# Altium PCB PMP30825_RevA.PcbDoc (part 1 of 3)
Units mil, origin at the board's own origin, x right, y up, seen from the top; angles counter-clockwise.
Board outline 3750 x 1750 mil, 2 copper layers (Top Layer, Bottom Layer), stack 62 mil thick; 85 components, 40 nets, 187 pads, 24 vias.
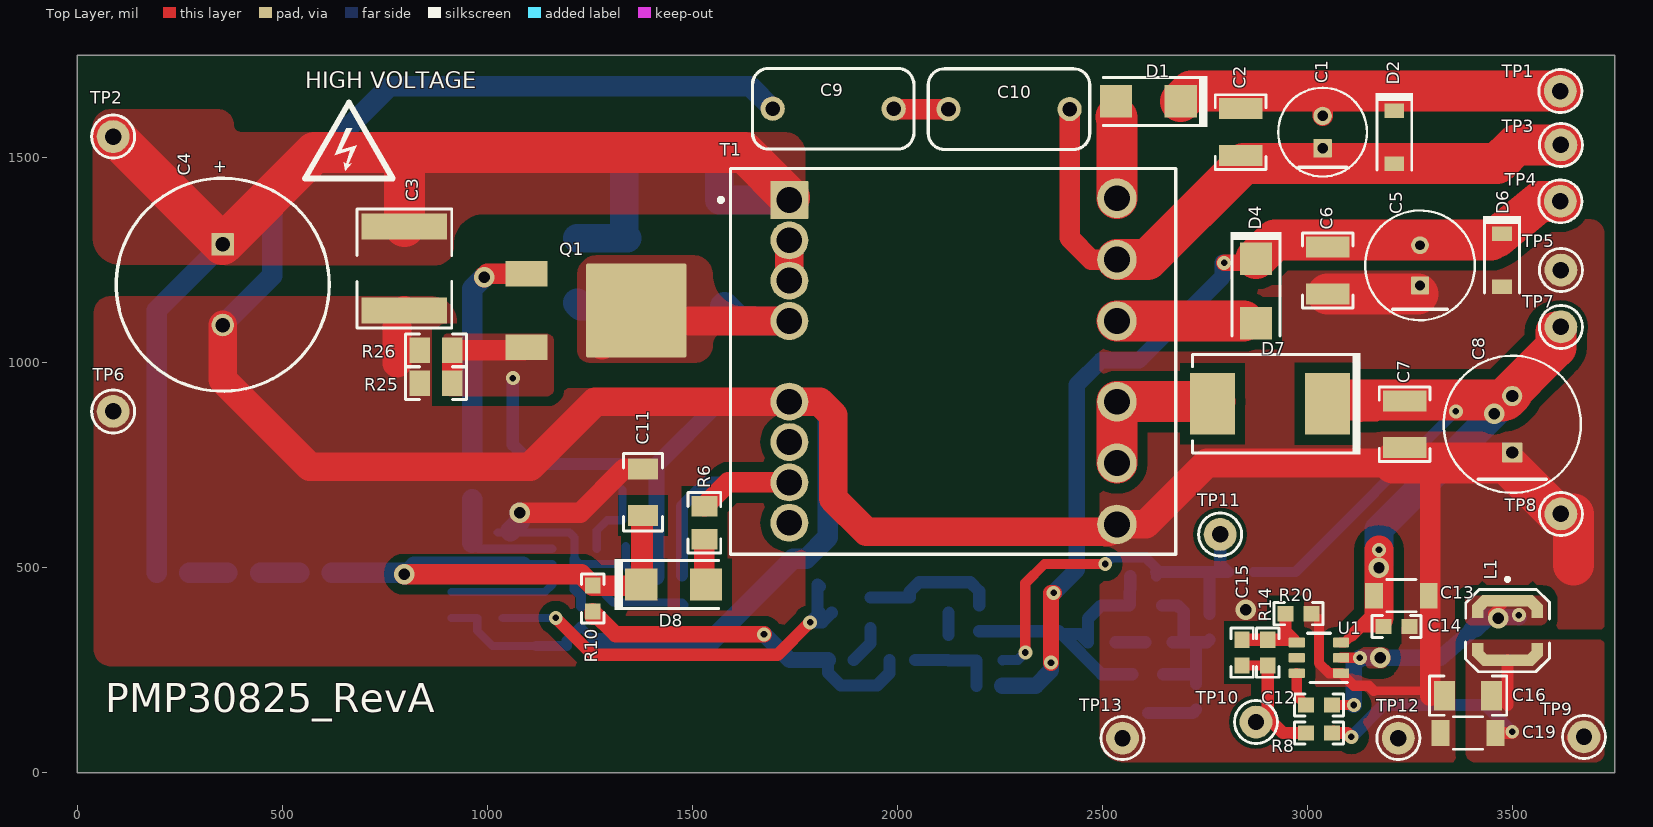
[diagram p0: Top Layer view]
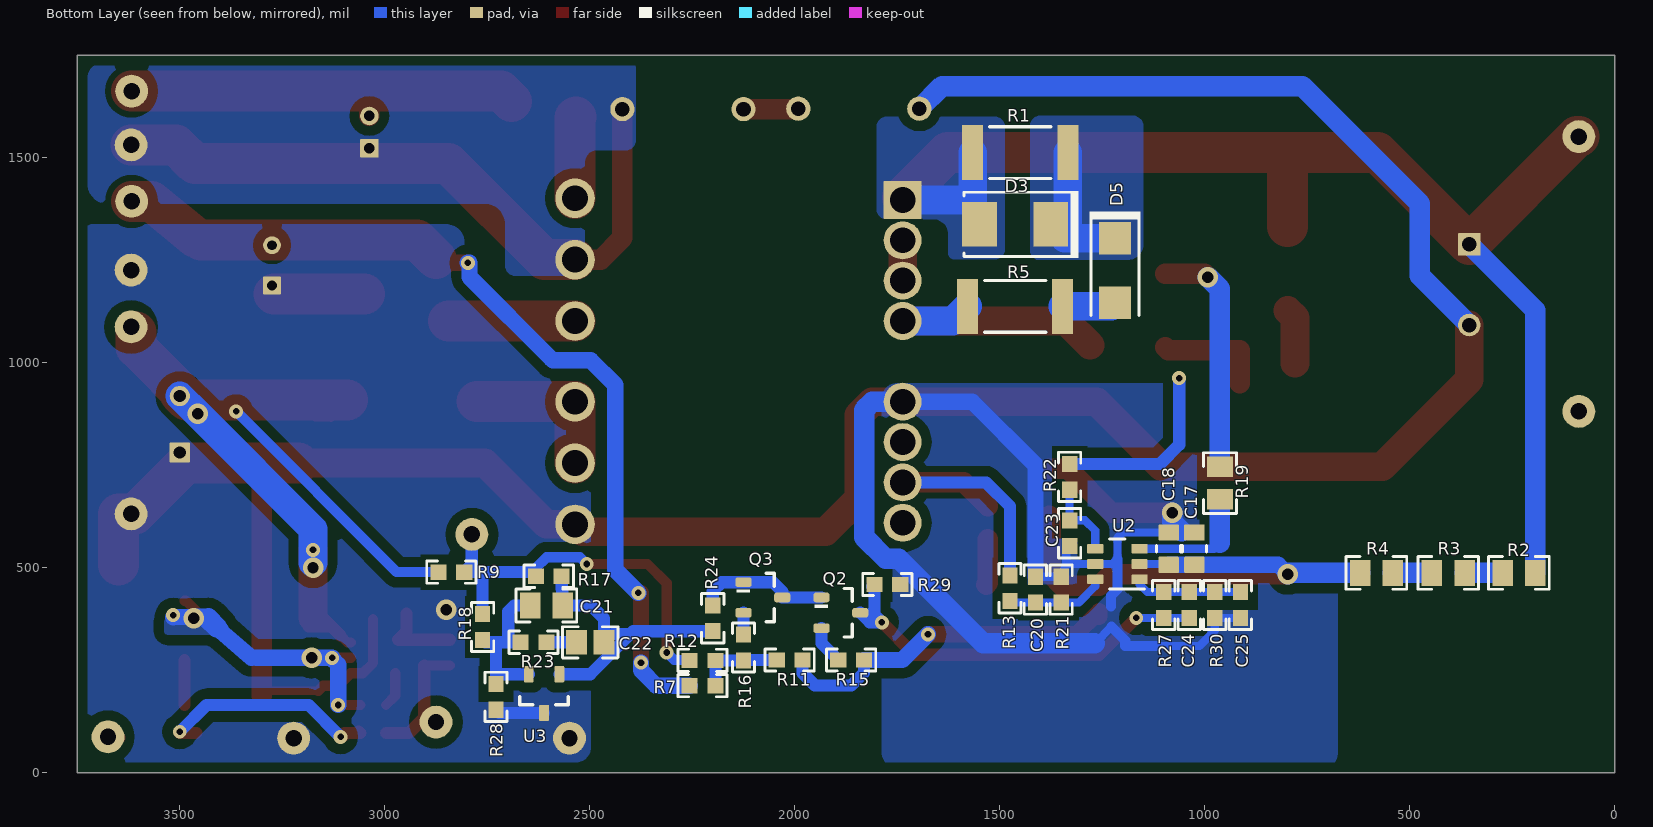
[diagram p1: Bottom Layer view, seen from below]

## Layer stack, top to bottom
Top Solder: solder mask 0.4, Solder Resist, Dk 3.5
Top Layer: signal copper 1.4
Dielectric1: core 59.2, FR-4, Dk 4.8
Bottom Layer: signal copper 1.4
Bottom Solder: solder mask 0.4, Solder Resist, Dk 3.5

## Board outline
0,0 3750,0 3750,1750 0,1750

## Design rules (kind name [scope] priority, off if disabled: settings)
AcuteAngle [All] p1: minimum=4.50000000000000E+0001 checktracksonly=FALSE
AssemblyTestPointUsage [All] p1: valid=2
BoardOutlineClearance BoardOutlineClearance_MountingHoles [OnCopper and InComponentClass('Mounting Holes')] p1: gap=39.37 ignorepadtopadclearanceinfootprint=FALSE
BoardOutlineClearance BoardOutlineClearance_Poly [OnCopper and IsPoly] p2: gap=25 ignorepadtopadclearanceinfootprint=FALSE
BoardOutlineClearance [OnCopper and Not InComponentClass('Logo') and not InComponentClass('FiducialMark') and not InRegion(1000,500,4000,800) and not InPoly] p3: gap=30 ignorepadtopadclearanceinfootprint=FALSE
Clearance Clearance_Keepouts [((IsTrack Or IsArc) And Not InPoly) And IsFree and IsKeepOut vs ((IsTrack Or IsArc) And Not InPoly) And IsFree and IsKeepOut] p1: gap=0 ignorepadtopadclearanceinfootprint=FALSE
Clearance Clearance_Poly [InPolygon] p2: gap=25 ignorepadtopadclearanceinfootprint=TRUE
Clearance Clearance_FiducialMark [IsKeepOut and InComponentClass('FiducialMark') vs IsPad and InComponentClass('FiducialMark')] p3: gap=0 ignorepadtopadclearanceinfootprint=FALSE
Clearance [All] p4: gap=7.87 ignorepadtopadclearanceinfootprint=TRUE
ComponentClearance ComponentClearance_MountingHoles_FiducialMarks [InComponentClass('Mounting Holes') vs InComponentClass('FiducialMark')] p1: gap=50 collisioncheckmode=3 verticalgap=10 showdistances=FALSE
ComponentClearance ComponentClearance_Shunt [InComponentClass('Header') vs InComponentClass('Shunt')] p2: gap=0 collisioncheckmode=3 verticalgap=0 showdistances=FALSE
ComponentClearance ComponentClearance_Logo [InComponentClass('Logo')] p3: gap=50 collisioncheckmode=3 verticalgap=10 showdistances=FALSE
ComponentClearance ComponentClearance_ScrewToNut [(HasFootprint('NY PMS 440 0025 PH')) vs (HasFootprint('Keystone_1902C'))] p4: gap=5 collisioncheckmode=3 verticalgap=10 showdistances=FALSE
ComponentClearance ComponentClearance_MountingHoles [InComponentClass('Mounting Holes')] p5: gap=250 collisioncheckmode=3 verticalgap=100000 showdistances=FALSE
ComponentClearance ComponentClearance_SmallPassives [HasFootprint('0201*') or HasFootprint('0402*') or HasFootprint('0508') or HasFootprint('0603*') or HasFootprint('0612') or HasFootprint('0805*') or HasFootprint('0815*') or HasFootprint('0830*') or HasFootprint('1206*') or HasFootprint('1210*') or HasFootprint('1808*') or HasFootprint('1812*') or HasFootprint('1825*') or HasFootprint('2010*') or HasFootprint('2220*') or HasFootprint('2225*') or HasFootprint('2512*') or HasFootprint('2728*') or HasFootprint('3518*') vs HasFootprint('0201*') or HasFootprint('0402*') or HasFootprint('0508') or HasFootprint('0603*') or HasFootprint('0612') or HasFootprint('0805*') or HasFootprint('0815*') or HasFootprint('0830*') or HasFootprint('1206*') or HasFootprint('1210*') or HasFootprint('1808*') or HasFootprint('1812*') or HasFootprint('1825*') or HasFootprint('2010*') or HasFootprint('2220*') or HasFootprint('2225*') or HasFootprint('2512*') or HasFootprint('2728*') or HasFootprint('3518*')] p6: gap=5 collisioncheckmode=3 verticalgap=10 showdistances=FALSE
ComponentClearance ComponentClearance_THtoSMT [IsThruComponent vs IsSMTComponent] p7: gap=40 collisioncheckmode=3 verticalgap=30 showdistances=FALSE
ComponentClearance ComponentClearance_THtoTH [IsThruComponent vs IsThruComponent] p8: gap=30 collisioncheckmode=3 verticalgap=30 showdistances=FALSE
ComponentClearance [All] p9: gap=30 collisioncheckmode=3 verticalgap=10 showdistances=FALSE
DiffPairsRouting [All] p1: maxlimit=100 minlimit=10 mostfreqgap=10 toplayer_minwidth=15 toplayer_maxwidth=15 toplayer_prefwidth=15 bottomlayer_minwidth=15 bottomlayer_maxwidth=15 bottomlayer_prefwidth=15 maxuncoupledlength=1000
FabricationTestPointUsage TestPointUsage [All] p1: valid=2 allowmultiple=FALSE
FabricationTestpoint Testpoint [All] p1: side=3 testpointundercomponent=TRUE minsize=40 maxsize=100 preferedsize=60 minholesize=0 maxholesize=40 preferedholesize=32 testpointgrid=1 allowsidetop=TRUE allowsidebottom=TRUE usegrid=TRUE gridtolerance=0.01
FanoutControl Fanout_LCC [IsLCC] p1: bgadir=Out bgaviamode=Centered fanoutstyle=Auto fanoutdirection=Alternating viagrid=1 // Fanout_LCC (Default Rule)
FanoutControl Fanout_BGA [IsBGA] p2: bgadir=Out bgaviamode=Centered fanoutstyle=Auto fanoutdirection=Alternating viagrid=1 // Fanout_BGA (Default Rule)
FanoutControl Fanout_Default [All] p4: bgadir=Out bgaviamode=Centered fanoutstyle=Auto fanoutdirection=Alternating viagrid=1 // Fanout_Default (Default Rule)
FanoutControl Fanout_Small [(CompPinCount < 5)] p5: bgadir=Out bgaviamode=Centered fanoutstyle=Auto fanoutdirection=OutThenIn viagrid=1 // Fanout_Small (Default Rule)
Height [All] p1: minheight=0 maxheight=2000 prefheight=500
HoleSize [All] p1: absolutevalues=TRUE maxlimit=251 minlimit=7.87 maxpercent=80.000 minpercent=20.000
MinimumAnnularRing MinimumAnnularRing_ThermalPadVias [IsVia and InAnyComponent] p1: minimumring=5.91
MinimumAnnularRing [All] p2: minimumring=7.87
MinimumSolderMaskSliver MinimumSolderMaskSliver_Logo [InComponentClass('Logo') vs InComponentClass('Logo')] p1: minsoldermaskwidth=0.7
MinimumSolderMaskSliver [All] p2: minsoldermaskwidth=3.94
PlaneConnect [All] p1: planeconnectstyle=Relief reliefexpansion=10 reliefentries=4 reliefconductorwidth=10 reliefairgap=10
PolygonConnect [All] p1: connectstyle=Direct reliefconductorwidth=10 reliefentries=4 polygonreliefangle="90 Angle" airgapwidth=10
RoutingVias ThermalPadVias [IsVia and InAnyComponent] p1: holewidth=7.87 width=19.68 viastyle="Through Hole" minholewidth=7.87 minwidth=19.68 maxholewidth=12.99 maxwidth=23.62
RoutingVias [All] p2: holewidth=16 width=34 viastyle="Through Hole" minholewidth=7.87 minwidth=26 maxholewidth=40 maxwidth=65
SilkToBoardRegionClearance [Not ((IsComment or IsDesignator) And (Hide <> 'False')) and not InRegion(1000,500,4000,800)] p1:
SilkToSilkClearance SilkToSilkClearance_Pb-FreeLogo [(HasFootprint('Pb-Free_Overlay_Medium') OR HasFootprint('Pb-Free_Overlay_Small')) vs (HasFootprint('Pb-Free_Overlay_Medium') OR HasFootprint('Pb-Free_Overlay_Small'))] p1: silktosilkclearance=0
SilkToSilkClearance [All] p2: silktosilkclearance=0
SilkToSolderMaskClearance SilkToComponentPadClearance [(IsPad or IsFill or IsRegion) and InAnycomponent] p1: minsilkscreentomaskgap=0 clearancetoexposedcopper=TRUE
SilkToSolderMaskClearance "Silk to Solder Mask Opening" [All] p2: minsilkscreentomaskgap=0 clearancetoexposedcopper=FALSE
SolderMaskExpansion [All] p1: expansion=1.97
UnRoutedNet [All] p1: checkbadconnections=TRUE
Width [All] p1: maxlimit=200 minlimit=6 preferedwidth=10 checkconnectedcopper=TRUE
13 further rules are at their usual default settings.

## Components (designator, comment, footprint, x,y, rotation, side; value= is the part's Value field where it differs from the comment)
C1 "UPW1E220MDD" FP-UPW1E220MDD_RADIAL-MFG 3037.5,1562.5 r90 top
C2 "DNP" 1210 2837.5,1562.5 r270 top
C3 "2220Y5000105KXTWS3" 2220 797.74,1229.8 r270 top value=1uF
C4 "EEU-ED2W150" ED_1250x2500 354.82,1190.43 r270 top value=15uF
C5 "25ZLG47MEFC6.3X7" FP-25ZLG47MEFC6.3X7_RADIAL-MFG 3275,1237.5 r90 top
C6 "DNP" 1210 3050,1225 r270 top
C7 "DNP" 1210 3237.5,850 r270 top
C8 "25AX220MEFC8X9" FP-25AX220MEFC8X9_RADIAL-MFG 3500,850 r90 top
C9 "TBD" KY_1000x500x1300 1843.75,1619.59 r180 top
C10 "TBD" KY_1000x500x1300 2272.64,1618.75 r180 top
C11 "DNP" 1206 1379.63,684.13 r90 top
C12 "GRM188R71H104KA93D" 0603 3028.54,165.29 r180 top value=0.1uF
C13 "GRM31CR71E106KA12L" 1206_180 3229.63,431.9 r0 top value=10uF
C14 "GRM188R71E104KA01D" 0603 3217.52,356.67 r0 top value=0.1uF
C15 "GRM1885C1H101JA01D" 0603 2841.04,292.79 r90 top value=100pF
C16 "DNP" 1206 3392.23,187.92 r180 top
C17 "GRM21BR71H105KA12L" 0805_HV1 1025.39,546.63 r90 bottom value=1uF
C18 "C0805C104J5RACTU" 0805_HV1 1087.89,546.63 r90 bottom value=0.1uF
C19 "GRM31CR71A226KE15L" 1206_180 3392.23,96.92 r180 top value=22uF
C20 "Used in BOM report" 0603 1412.89,446.63 r90 bottom value=DNP
C21 "GRM216R71H103KA01D" 0805_HV 2605.71,408.13 r180 bottom value=0.01uF
C22 "DNP" 0805 2498.92,318.15 r0 bottom
C23 "Used in BOM report" 0603 1329.63,584.13 r270 bottom value=DNP
C24 "C0603X103K5RACTU" 0603 1037.89,409.13 r270 bottom value=0.01uF
C25 "DNP" 0603 912.89,409.13 r270 bottom
D1 "SS110-TP" SMA 2612.5,1637.5 r180 top value=100V
D2 "MMSZ5250B-7-F" SOD-123 3212.5,1550 r270 top value=20V
D3 "SMBJ170A-13-F" SMB 1462.5,1337.5 r0 bottom value=170V
D4 "SS110-TP" SMA 2875,1175 r270 top value=100V
D5 "US1J-13-F" SMA 1219.14,1225 r270 bottom value=600V
D6 "MMSZ5248B-7-F" SOD-123 3475,1250 r270 top value=18V
D7 "B380-13-F" SMC 2909.25,900 r180 top value=80V
D8 "ES1C-13-F" SMA 1454.63,459.13 r0 top value=150V
"HIGH VOLTAGE" "DANGER HIGH VOLTAGE" IEC_HighVoltage_Small 662.5,1537.5 r0 top
L1 "LPS4018-333MLB" LPS4018 3488.54,346.79 r270 top value=33uH
Q1 "IPD70R1K4CEAUMA1" DPAK 1229.63,1127.44 r0 top value=750V
Q2 "MMBT3906" SOT-23 1887.5,390.17 r180 bottom value="40 V"
Q3 "MMBT3906" SOT-23 2077.76,427.58 r180 bottom value="40 V"
R1 "Used in BOM report" 2512 1450,1512.5 r0 bottom value=DNP
R2 "CRCW08054M99FKEA" 0805_HV 233.75,487.5 r180 bottom value=4.99Meg
R3 "CRCW08054M99FKEA" 0805_HV 406.25,487.5 r180 bottom value=4.99Meg
R4 "CRCW08054M99FKEA" 0805_HV 581.25,487.5 r180 bottom value=4.99Meg
R5 "CRCW2512200RJNEG" 2512 1462.5,1137.5 r180 bottom value=200
R6 "CRCW080530R1FKEA" 0805_HV 1529.63,609.72 r90 top value=30.1
R7 "CRCW06030000Z0EA" 0603 2225,212.5 r0 bottom value=0
R8 "CRCW060349R9FKEA" 0603 3028.54,96.92 r0 top value=49.9
R9 "CRCW060349R9FKEA" 0603 2837.5,489.43 r0 bottom value=49.9
R10 "Used in BOM report" 0603 1257.26,425 r90 top value=DNP
R11 "CRCW06030000Z0EA" 0603 2012.5,275 r180 bottom value=0
R12 "Used in BOM report" 0603 2225,273.91 r180 bottom value=DNP
R13 "CRCW0603115KFKEA" 0603 1475,450 r90 bottom value=115k
R14 "CRCW0603100KFKEA" 0603 2903.54,292.79 r270 top value=100k
R15 "CRCW06030000Z0EA" 0603 1862.5,275 r180 bottom value=0
R16 "CRCW06030000Z0EA" 0603 2125,305.41 r270 bottom value=0
R17 "Used in BOM report" 0603 2600,479 r180 bottom value=DNP
R18 "CRCW0603169KFKEA" 0603 2761.42,355.65 r90 bottom value=169k
R19 "CRCW08050000Z0EA" 0805_HV 962.89,706.63 r90 bottom value=0
R20 "CRCW060313K7FKEA" 0603 2978.54,388.1 r180 top value=13.7k
R21 "CRCW060322K6FKEA" 0603 1350.39,446.63 r270 bottom value=22.6k
R22 "CRCW06031K54FKEA" 0603 1329.63,721.63 r270 bottom value=1.54k
R23 "DNP" 0603 2637.21,318.15 r0 bottom
R24 "CRCW06034K99FKEA" 0603 2200,376.81 r90 bottom value=4.99k
R25 "ERJ-6RQF4R7V" 0805_HV 875,950 r0 top value=4.70
R26 "ERJ-6RQF3R3V" 0805_HV 875,1030.45 r0 top value=3.30
R27 "CRCW060332K4FKEA" 0603 1100.39,409.13 r90 bottom value=32.4k
R28 "CRCW060344K2FKEA" 0603 2728.64,185.03 r90 bottom value=44.2k
R29 "Used in BOM report" 0603 1774.15,459.13 r180 bottom value=DNP
R30 "CRCW06034K02FKEA" 0603 975.39,409.13 r90 bottom value=4.02k
T1 "750319024r00" FP-750319024r00_PTH_TRANSFORMER-MFG 2136.32,1003.42 r0 top
TP1 "5000" Keystone5000 3617.46,1662.5 r90 top
TP2 "5000" Keystone5000 87.5,1551.66 r90 top
TP3 "5001" Keystone5001 3618.75,1531.25 r90 top
TP4 "5000" Keystone5000 3617.46,1393.75 r90 top
TP5 "5001" Keystone5001 3618.75,1226.09 r90 top
TP6 "5001" Keystone5001 87.5,881.25 r90 top
TP7 "5000" Keystone5000 3618.75,1087.5 r90 top
TP8 "5001" Keystone5001 3618.75,631.25 r90 top
TP9 "5000" Keystone5000 3675,87.5 r90 top
TP10 "5000" Keystone5000 2875,123.71 r270 top
TP11 "5000" Keystone5000 2787.5,581.25 r270 top value=Red
TP12 "5001" Keystone5001 3222.22,84.42 r90 top
TP13 "5001" Keystone5001 2549.39,84.42 r270 top value=Black
U1 "TPS54202DDCR" DDC0006A_N 3028.54,280.29 r180 top
U2 "UCC28742DBVR" DBV0006A_N 1212.89,509.13 r0 bottom
U3 "ATL431LIBQDBZR" DBZ0003A_N 2611.42,193.15 r270 bottom

## Footprints (in the part's own frame and the unit in brackets; to place one, negate y for a bottom-side part, rotate by r counter-clockwise, add the part's x,y. Pads: shape width x height; smd on the part's side, far side on the other; paste and mask are expansions set on the pad)
0603 [mm] "0603 from SM-752 data"
  rect 1x0.95 smd: 1(-0.8,0) 2(0.8,0)
  silkscreen extent -1.52,-0.69 1.52,0.69, body extent -0.87,-0.47 0.87,0.47, height 1
0805 [mm] "0805 from SM-752 data"
  rect 1.3x1.5 smd: 1(-0.85,0) 2(0.85,0)
  silkscreen extent -1.72,-0.97 1.72,0.97, body extent -1.1,-0.72 1.1,0.72, height 1.45
0805_HV [mil] "0805 with 30mil clearance between pads"
  rect 50x63 smd: 1(-40,0) 2(40,0)
  silkscreen extent -74,-40 74,40, body extent -43,-29 43,29, height 57
0805_HV1 [mm] "Custom footprint based on analyzing multiple manufacturer recommendations"
  rrect10% 1x1.25 smd: 1(-1,0) 2(1,0)
  silkscreen extent -0.2,-0.75 0.2,0.75, body extent -1.1,-0.72 1.1,0.73, height 1.45
1206 [mm] "1206 from SM-752 data"
  rect 1.3x1.85 smd: 1(-1.45,0) 2(1.45,0)
  silkscreen extent -2.4,-1.21 2.4,1.21, body extent -1.7,-0.9 1.7,0.9, height 1.35
1206_180 [mm] "1206_180"
  rect 1.1x1.6 smd: 1(-1.7,0) 2(1.7,0)
  silkscreen extent -0.9,-1 0.9,1, body extent -1.75,-0.95 1.75,0.95, height 1.8
1210 [mm] "1210 from SM-752 data"
  rect 1.3x2.7 smd: 1(-1.45,0) 2(1.45,0)
  silkscreen extent -2.32,-1.57 2.32,1.57, body extent -1.7,-1.35 1.7,1.35, height 1.35
2220 [mm] "Chip Capacitor, Body 5.7x5.0mm, IPC Medium Density"
  rect 1.6x5.3 smd: 1(-2.6,0) 2(2.6,0)
  silkscreen extent -3.69,-2.94 3.69,2.94, body extent -2.95,-2.62 2.95,2.62, height 1.35
2512 [mm] "Chip Resistor, Body 6.3x3.2mm, IPC Medium Density"
  rect 1.3x3.4 smd: 1(-2.95,0) 2(2.95,0)
  silkscreen extent -1.9,-1.6 1.9,1.6, body extent -3.22,-1.67 3.22,1.67, height 0.71
DBV0006A_N [mm] "SOT23, 6-Leads, Body 2.9x1.6mm, Pitch 0.95mm, Lead Span 2.8mm, IPC Medium Density"
  rrect17% 1x0.6 smd: 1(-1.375,0.95) 2(-1.375,0) 3(-1.375,-0.95) 4(1.375,-0.95) 5(1.375,0) 6(1.375,0.95)
  silkscreen extent -1.68,-1.55 0.5,1.55, body extent -1.42,-1.46 1.42,1.46, height 1.12
DBZ0003A_N [mm] "SOT23, 3-Leads, Body 2.9x1.3mm, Pitch 0.95mm, Lead Span 2.4mm, IPC Medium Density"
  rrect17% 1x0.6 smd: 1(-1.2,0.95) 2(-1.2,-0.95) 3(1.2,0)
  silkscreen extent 0.2,-1.5 0.7,1.5, body extent -1.26,-1.46 1.26,1.46, height 0.98
DDC0006A_N [mm]
  rrect17% 1x0.6 smd: 1(-1.375,0.95) 2(-1.375,0) 3(-1.375,-0.95) 4(1.375,-0.95) 5(1.375,0) 6(1.375,0.95)
  silkscreen extent -1.75,-1.52 0.7,1.53, body extent -1.43,-1.48 1.43,1.49, height 0.92
DPAK [mm] "D-PAK, 3-Pads, Body 6.22x6.73mm (max), TO-252AA using nominal STEP model"
  rrect6% 2.6x1.6 smd: 1(-3.4,2.28) 3(-3.4,-2.28)
  rrect2% 6.2x5.8 smd paste-3: 2(3.4,0)
  body extent -3.86,-3.29 5.84,3.29, height 2.48
ED_1250x2500 [mm] "TH, 2-Leads, Dia 12.5mm, Lead Sapcing 5mm"
  rrect7% 1.4x1.4 hole 0.9: 1(-2.5,0)
  round 1.4 hole 0.9: 2(2.5,0)
  silkscreen extent -6.6,-6.6 6.6,6.6, body extent -6.5,-6.5 6.51,6.5, height 27.01
FP-25AX220MEFC8X9_RADIAL-MFG [mm]
  rrect8% 1.25x1.25 hole 0.75 paste-1000 mask+0: 1(-1.75,0)
  round 1.25 hole 0.75 paste-1000 mask+0: 2(1.75,0)
  silkscreen extent -4.25,-4.25 4.25,4.25, body extent -4.35,-4.35 4.35,4.35, height 0.25
FP-25ZLG47MEFC6.3X7_RADIAL-MFG [mm]
  rrect9% 1.1x1.1 hole 0.6 paste-1000 mask+0: 1(-1.25,0)
  round 1.1 hole 0.6 paste-1000 mask+0: 2(1.25,0)
  silkscreen extent -3.4,-3.4 3.4,3.4, body extent -3.5,-3.5 3.5,3.5, height 0.25
FP-750319024r00_PTH_TRANSFORMER-MFG [mm]
  rrect4% 2.35x2.35 hole 1.6 paste-1000 mask+0: 1(-10.15,10)
  round 2.35 hole 1.6 paste-1000 mask+0: 2(-10.15,7.5) 3(-10.15,5) 4(-10.15,2.5) 5(-10.15,-2.5) 6(-10.15,-5) 7(-10.15,-7.5) 8(-10.15,-10)
  round 2.45 hole 1.6 paste-1000 mask+0: 9(10.15,-10.1) 10(10.15,-6.3) 11(10.15,-2.5) 12(10.15,2.5) 13(10.15,6.3) 14(10.15,10.1)
  silkscreen extent -14.51,-11.95 13.79,11.95, body extent -13.89,-12.05 13.89,12.05, height 0.25
FP-UPW1E220MDD_RADIAL-MFG [mm]
  rrect9% 1.15x1.15 hole 0.65 paste-1000 mask+0: 1(-1,0)
  round 1.15 hole 0.65 paste-1000 mask+0: 2(1,0)
  silkscreen extent -2.75,-2.75 2.75,2.75, body extent -2.85,-2.85 2.85,2.85, height 0.25
IEC_HighVoltage_Small [mil]
  silkscreen extent -107,-88 107,97
Keystone5000 [mil] "For Keystone 500x miniature loop terminals"
  round 80 hole 40: 1(0,0)
  silkscreen extent -52,-52 52,52, body extent -49,-49 49,49, height 182
Keystone5001 [mil] "For Keystone 500x miniature loop terminals"
  round 80 hole 40: 1(0,0)
  silkscreen extent -52,-52 52,52, body extent -49,-49 49,49, height 182
KY_1000x500x1300 [mm] "MuRata"
  round 1.5 hole 0.9: 1(-3.75,0) 2(3.75,0)
  silkscreen extent -5,-2.5 5,2.5, body extent -5,-2.5 5,2.5, height 13
LPS4018 [mil]
  rect 28x123 smd: 1(-72.5,0) 2(72.5,0)
  rect 35.5x28 smd rot 45: 1(-64,64) 2(64.5,-63.5)
  rect 35.5x28 smd rot 135: 1(-64,-64) 2(64,64)
  rect 31.5x28 smd: 1(-46,72.5) 1(-46,-72.5) 2(46,72.5) 2(46,-72.5)
  silkscreen extent -129,-103 101,102, body extent -81,-81 81,81, height 71
SMA [mm] "Molded Diode, 2-Leads, Body 4.3x2.6mm, IPC Medium Density, based on OnSemi component dimensions and land pattern"
  rect 2x2 smd: 1(-2,0) 2(2,0)
  silkscreen extent -3.66,-1.57 2.79,1.57, body extent -2.6,-1.3 2.6,1.3, height 2.42
SMB [mil] "Molded Diode, 2-Leads, Body 5.4x3.6mm, IPC Medium Density, based on OnSemi component dimensions"
  rect 85x107.99 smd: 1(-87.01,0) 2(87.01,0)
  silkscreen extent -155,-82 125,82, body extent -106,-71 106,71, height 91
SMC [mil] "Molded Diode, 2-Leads, Body 6.9x5.8mm, IPC Medium Density, based on OnSemi component dimensions and land patterns"
  rect 110x150 smd: 1(-140.49,0) 2(140.49,0)
  silkscreen extent -221,-124 189,123, body extent -156,-116 156,116, height 91
SOD-123 [mm] "On Semi recommended land pattern"
  rect 0.915x1.22 smd: 1(-1.637,0) 2(1.637,0)
  silkscreen extent -2.74,-1.17 2.03,1.17, body extent -1.93,-0.9 1.93,0.9, height 1.35
SOT-23 [mm] "SOT23, 3-Leads, Body 2.9x1.3mm, Pitch 0.95mm, Lead Span 2.5mm, IPC Medium Density"
  rrect50% 1x0.6 smd: 1(-1.2,0.95) 2(-1.2,-0.95) 3(1.2,0)
  silkscreen extent -1.63,-1.5 0.7,1.5, body extent -1.16,-1.45 1.21,1.45, height 1

## Part data
C1: library part CMP-0088544-1, "22uF 25 V dc Aluminium Electrolytic Capacitor, PW Series 2000h 5 (Dia.) x 11mm", Digikey Part Number=493-1811-ND, Leakage Current=16.5uA, Manufacturer=Nichicon, Mouser Part Number=647-UPW1E220MDD, Operating Temperature Range="-55°C to +105°C", Tolerance_%=20%, ValueDisplayed=22uF, AEC Grade="Grade 2", AEC Qualified=Yes, Cap_F=22µF, ComponentLink1Description=Datasheet, ComponentLink1URL=https://products.nichicon.co.jp/en/pdf/XJA043/e-upw.pdf, datasheet=https://products.nichicon.co.jp/en/pdf/XJA043/e-upw.pdf, Datasheet Path=datasheets/Cap-UPW1E220MDD.pdf, Digikey Description="CAP ALUM 22UF 20% 25V RADIAL", Dissipation Factor=14%, helpURL=https://upverter.com/upn/revision/dc22ef000e10bc70/, IRMS_A=180mA, Lead Free=Yes, Life=2000Hours, PackageReference=RADIAL, Part Number=UPW1E220MDD, RoHS=TRUE, SizeZ_mm=12.5mm, Supplier 1=Digikey, Supplier 2=Mouser, Supplier Part Number 1=493-1811-ND, Supplier Part Number 2=647-UPW1E220MDD, VDC_V=25V
C2 C6 C7 C11 C16 C22 C25: library part Capacitor, "CAP, CERM, xxxF, xxV, [TempCo], xx%, [PackageReference]", Alternate Manufacturer=-, Manufacturer="Used in BOM report", Alternate PartNumber=-, ComponentLink1Description="Datasheet Link", ComponentLink1URL="Paste URL for datasheet here", CompType=Capacitor, LatestRevisionDate=2017-05-31, LatestRevisionNote="Added Alternate PartNumber and Alternate Manufacturer parameters to appropriate components.", MountType="SMT or TH (used in PnP report)", PackageReference="Used in PnP output and some BOM reports", PartNumber=DNP, Polarized=N, Publisher="Texas Instruments", RoHS="Used in BOM report.  Use Y or N.", SymbolVersion=2008-07-09, U/M=EA
C3: library part Capacitor, "CAP, CERM, 1uF,500V, [TempCo], xx%, [PackageReference]", Alternate Manufacturer=-, Manufacturer="Knowles Syfer", Alternate PartNumber=-, ComponentLink1Description="Datasheet Link", ComponentLink1URL="Paste URL for datasheet here", CompType=Capacitor, LatestRevisionDate=2017-05-31, LatestRevisionNote="Added Alternate PartNumber and Alternate Manufacturer parameters to appropriate components.", MountType="SMT or TH (used in PnP report)", PackageReference=2220, PartNumber=2220Y5000105KXTWS3, Polarized=N, Publisher="Texas Instruments", RoHS="Used in BOM report.  Use Y or N.", SymbolVersion=2008-07-09, U/M=EA
C4: "CAP, AL, 15 µF, 450 V, +/- 20%, TH", Cap_Case=12.5x25mm, Manufacturer=Panasonic, Supplier Part Number 1=P13559-ND, Tolerance_%=20, Value2=450V, ValueDisplayed=15µF, AEC Category=Q200, AEC Grade=N/A, AEC Qualified=N, Cap_F=0.000015, ComponentLink1Description="Datasheet link", ComponentLink1URL=http://industrial.panasonic.com/cdbs/www-data/pdf/RDF0000/ABA0000CE86.pdf, CompType=Capacitor, IRMS_A=0.56, LatestRevisionDate=2017-06-22, MountType=TH, PackageReference=D12.5xL25mm, PartNumber=EEU-ED2W150, Polarized=Y, Publisher="Texas Instruments", RoHS=Y, Series=ED, SizeArea_mm2=156.25, SizeAreaWB_mm2=210.25, SizeX_mm=12.5, SizeY_mm=12.5, SizeZ_mm=27, Supplier 1=Digi-Key, Supplier 2=Newark, Supplier 3=Mouser, Supplier Part Number 2=96K9475, Supplier Part Number 3=667-EEU-ED2W150, SymbolVersion=2008-07-09, TaMax_C=105, TaMin_C=-25, Technology=AL, U/M=EA, VDC_V=450
C5: library part CMP-0088537-1, "Cap Aluminum 47uF 25V 20% (6.3 X 7mm) Radial 2.5mm 480mA 1000 hr 105°C Bulk", Digikey Part Number=1189-4172-ND, Leakage Current=35.25uA, Manufacturer=Rubycon, Mouser Part Number=232-25ZLG47MEFC6.3X7, Operating Temperature Range="-40°C to +105°C", Tolerance_%=20%, ValueDisplayed=47uF, AEC Qualified=No, Cap_F=47µF, ComponentLink1Description=Datasheet, ComponentLink1URL=http://www.rubycon.co.jp/en/catalog/e_pdfs/aluminum/e_ZLG.pdf, datasheet=http://www.rubycon.co.jp/en/catalog/e_pdfs/aluminum/e_ZLG.pdf, Datasheet Path=datasheets/Cap-25ZLG47MEFC6.3X7.pdf, Digikey Description="CAP ALUM 47UF 20% 25V RADIAL", Dissipation Factor=14%, helpURL=https://upverter.com/upn/revision/d1e3d443faba1285/, IRMS_A=480mA, Lead Free=Yes, Life=1000Hours, PackageReference=RADIAL, Part Number=25ZLG47MEFC6.3X7, RoHS=TRUE, SizeZ_mm=8mm, Supplier 1=Digikey, Supplier 2=Mouser, Supplier Part Number 1=1189-4172-ND, Supplier Part Number 2=232-25ZLG47MEFC6.3X7, VDC_V=25V
C8: library part CMP-0088565-1, "220µF 25V Aluminum Electrolytic Capacitors Radial, Can 2000 Hrs @ 105°C", Digikey Part Number=1189-2906-ND, Leakage Current=55uA, Manufacturer=Rubycon, Mouser Part Number=232-25AX220MEFC8X9, Operating Temperature Range="-40°C to +105°C", Tolerance_%=20%, ValueDisplayed=220uF, AEC Qualified=No, Cap_F=220µF, ComponentLink1Description=Datasheet, ComponentLink1URL=http://www.rubycon.co.jp/en/catalog/e_pdfs/aluminum/e_AX.pdf, datasheet=http://www.rubycon.co.jp/en/catalog/e_pdfs/aluminum/e_AX.pdf, Datasheet Path=datasheets/Cap-25AX220MEFC8X9.pdf, Digikey Description="CAP ALUM 220UF 20% 25V RADIAL", Dissipation Factor=14%, helpURL=https://upverter.com/upn/revision/a3c110b3ba59c556/, IRMS_A=1.36A, Lead Free=Yes, Life=2000Hours, PackageReference=RADIAL, Part Number=25AX220MEFC8X9, RoHS=TRUE, SizeZ_mm=10.5mm, Supplier 1=Digikey, Supplier 2=Mouser, Supplier Part Number 1=1189-2906-ND, Supplier Part Number 2=232-25AX220MEFC8X9, VDC_V=25V
C9 C10: library part DE2E3KY472MB3BM02F, "CAP, CERM, 4700 pF, X1 250 VAC/Y2 300 VAC, +/- 20%, E, 10x5x13mm", Cap_Case=10x5x13mm, Manufacturer=MuRata, Supplier Part Number 1=490-9484-ND, TempCo=E, Tolerance_%=20, AC_Safety=X1Y2, AEC Category=Q200, AEC Grade=N/A, AEC Qualified=N, Cap_F=0.0000000047, ComponentLink1Description="Datasheet link", ComponentLink1URL=http://psearch.en.murata.com/capacitor/product/DE2E3KY472MB3BM02F.pdf, CompType=Capacitor, LatestRevisionDate=2017-06-22, MountType=TH, PackageReference=10x5x13mm, PartNumber=TBD, Polarized=N, Published=2008-06-19, Publisher="Texas Instruments", RoHS=Y, SizeArea_mm2=50, SizeAreaWB_mm2=84, SizeX_mm=10, SizeY_mm=5, SizeZ_mm=13, Supplier 1=Digi-Key, Supplier 2=Mouser, Supplier Part Number 2=81-DE2E3KY472MB3BM2F, SymbolVersion=2008-07-09, TaMax_C=125, TaMin_C=-40, Technology=Ceramic, U/M=EA, VAC_X=250, VAC_Y=300, ValueDisplayed=TBD
C12: "CAP, CERM, 0.1 µF, 50 V,+/- 10%, X7R, 0603", Cap_Case=0603, Manufacturer=MuRata, Supplier Part Number 1=490-1519-1-ND, TempCo=X7R, Tolerance_%=10, Value2=50V, ValueDisplayed=0.1µF, AEC Category=Q200, AEC Qualified=?, Cap_F=0.0000001, ComponentLink1Description="Datasheet link", ComponentLink1URL=http://search.murata.co.jp/Ceramy/PnsearchViewAction.do?HnOFG=ON&HnNFG=ON&SEL_CNT=50&sLang=en&sKey=GRM188R71H104KA93D&x=9&y=9&search=startwith, CompType=Capacitor, Green_EU RoHS=Passed, Green_EU RoHS-2=Incomplete, Green_Lifecycle=Active, Green_REACh=Passed, LatestRevisionDate=2017-06-22, MountType=SMT, PackageReference=0603, PartNumber=GRM188R71H104KA93D, Polarized=N, Published=2008-06-19, Publisher="Texas Instruments", RoHS=Y, SizeArea_mm2=1.28, SizeAreaWB_mm2=4.68, SizeX_mm=1.6, SizeY_mm=0.8, SizeZ_mm=1, Supplier 1=Digi-Key, Supplier 2=Mouser, Supplier 3=Farnell, Supplier Part Number 2=81-GRM39X104K50D, Supplier Part Number 3=8820023, SymbolVersion=2008-07-09, TaMax_C=125, TaMin_C=-55, Technology=Ceramic, U/M=EA, VDC_V=50
C13: "CAP, CERM, 10 µF, 25 V,+/- 10%, X7R, 1206", Cap_Case=1206, Manufacturer=MuRata, Supplier Part Number 1=81-GRM31CR71E106KA12, TempCo=X7R, Tolerance_%=10, Value2=25V, ValueDisplayed=10µF, AEC Category=Q200, AEC Qualified=?, Cap_F=0.00001, ComponentLink1Description="Datasheet link", ComponentLink1URL=http://search.murata.co.jp/Ceramy/PnsearchViewAction.do?HnOFG=ON&HnNFG=ON&SEL_CNT=50&sLang=en&sKey=GRM31CR71E106KA12L&x=9&y=9&search=startwith, CompType=Capacitor, Green_EU RoHS=Passed, Green_EU RoHS-2=Incomplete, Green_Lifecycle=Active, Green_REACh=Passed, LatestRevisionDate=2017-06-22, MountType=SMT, PackageReference=1206, PartNumber=GRM31CR71E106KA12L, Polarized=N, Published=2008-06-19, Publisher="Texas Instruments", RoHS=Y, SizeArea_mm2=5.12, SizeAreaWB_mm2=10.92, SizeX_mm=3.2, SizeY_mm=1.6, SizeZ_mm=1.8, Supplier 1=Mouser, Supplier 2=Farnell, Supplier Part Number 2=1828837, SymbolVersion=2008-07-09, TaMax_C=125, TaMin_C=-55, Technology=Ceramic, U/M=EA, VDC_V=25
C14: "CAP, CERM, 0.1 µF, 25 V,+/- 10%, X7R, 0603", Cap_Case=0603, Manufacturer=MuRata, Supplier Part Number 1=490-1524-1-ND, TempCo=X7R, Tolerance_%=10, Value2=25V, ValueDisplayed=0.1µF, AEC Category=Q200, AEC Qualified=?, Cap_F=0.0000001, ComponentLink1Description="Datasheet link", ComponentLink1URL=http://search.murata.co.jp/Ceramy/PnsearchViewAction.do?HnOFG=ON&HnNFG=ON&SEL_CNT=50&sLang=en&sKey=GRM188R71E104KA01D&x=9&y=9&search=startwith, CompType=Capacitor, Green_EU RoHS=Passed, Green_EU RoHS-2=Passed, Green_Lifecycle=Active, Green_REACh=Passed, LatestRevisionDate=2017-06-22, MountType=SMT, PackageReference=0603, PartNumber=GRM188R71E104KA01D, Polarized=N, Published=2008-06-19, Publisher="Texas Instruments", RoHS=Y, SizeArea_mm2=1.28, SizeAreaWB_mm2=4.68, SizeX_mm=1.6, SizeY_mm=0.8, SizeZ_mm=1, Supplier 1=Digi-Key, Supplier 2=Mouser, Supplier 3=Farnell, Supplier Part Number 2=81-GRM39X104K25, Supplier Part Number 3=1828899, SymbolVersion=2008-07-09, TaMax_C=125, TaMin_C=-55, Technology=Ceramic, U/M=EA, VDC_V=25
C15: "CAP, CERM, 100 pF, 50 V,+/- 5%, C0G/NP0, 0603", Cap_Case=0603, Manufacturer=MuRata, Supplier Part Number 1=490-1427-1-ND, TempCo=C0G/NP0, Tolerance_%=5, Value2=50V, ValueDisplayed=100pF, AEC Category=Q200, AEC Qualified=?, Cap_F=0.0000000001, ComponentLink1Description="Datasheet link", ComponentLink1URL=http://search.murata.co.jp/Ceramy/PnsearchViewAction.do?HnOFG=ON&HnNFG=ON&SEL_CNT=50&sLang=en&sKey=GRM1885C1H101JA01D&x=9&y=9&search=startwith, CompType=Capacitor, Green_EU RoHS=Passed, Green_EU RoHS-2=Incomplete, Green_Lifecycle=Active, Green_REACh=Passed, LatestRevisionDate=2017-06-22, MountType=SMT, PackageReference=0603, PartNumber=GRM1885C1H101JA01D, Polarized=N, Published=2008-06-19, Publisher="Texas Instruments", RoHS=Y, SizeArea_mm2=1.28, SizeAreaWB_mm2=4.68, SizeX_mm=1.6, SizeY_mm=0.8, SizeZ_mm=1, Supplier 1=Digi-Key, Supplier 2=Mouser, Supplier 3=Farnell, Supplier Part Number 2=81-GRM39C101J50, Supplier Part Number 3=8819866, SymbolVersion=2008-07-09, TaMax_C=125, TaMin_C=-55, Technology=Ceramic, U/M=EA, VDC_V=50
C17: "CAP, CERM, 1 µF, 50 V,+/- 10%, X7R, 0805", Cap_Case=0805, Manufacturer=MuRata, Supplier Part Number 1=490-4736-1-ND, TempCo=X7R, Tolerance_%=10, Value2=50V, ValueDisplayed=1µF, AEC Category=Q200, AEC Qualified=?, Cap_F=0.000001, ComponentLink1Description="Datasheet link", ComponentLink1URL=http://search.murata.co.jp/Ceramy/PnsearchViewAction.do?HnOFG=ON&HnNFG=ON&SEL_CNT=50&sLang=en&sKey=GRM21BR71H105KA12L&x=9&y=9&search=startwith, CompType=Capacitor, Green_EU RoHS=Passed, Green_EU RoHS-2=Passed, Green_Lifecycle=Active, Green_REACh=Passed, LatestRevisionDate=2017-06-22, MountType=SMT, PackageReference=0805, PartNumber=GRM21BR71H105KA12L, Polarized=N, Published=2008-06-19, Publisher="Texas Instruments", RoHS=Y, SizeArea_mm2=2.5, SizeAreaWB_mm2=6.75, SizeX_mm=2, SizeY_mm=1.25, SizeZ_mm=1.45, Supplier 1=Digi-Key, Supplier 2=Mouser, Supplier 3=Farnell, Supplier Part Number 2=81-GRM21BR71H105KA2L, Supplier Part Number 3=1735541, SymbolVersion=2008-07-09, TaMax_C=125, TaMin_C=-55, Technology=Ceramic, U/M=EA, VDC_V=50
C18: "CAP, CERM, 0.1 µF, 50 V,+/- 5%, X7R, 0805", Cap_Case=0805, Manufacturer=Kemet, Supplier Part Number 1=64K2889, TempCo=X7R, Tolerance_%=5, Value1="0.064 ohm", Value2=50V, ValueDisplayed=0.1µF, AEC Category=Q200, AEC Qualified=?, Cap_F=0.0000001, ComponentLink1Description="Datasheet link", ComponentLink1URL=http://www.kemet.com/kemet/web/homepage/kechome.nsf/file/Partial%20Copy%20-%20Ceramic%20Surface%20Mount%20Capacitors/$file/F3102_CE.pdf, CompType=Capacitor, ESR_Ohm=0.064, Green_EU RoHS=Passed, Green_EU RoHS-2=Passed, Green_Lifecycle=Active, Green_REACh=Passed, IRMS_A=1.64, LatestRevisionDate=2017-06-22, MountType=SMT, PackageReference=0805, PartNumber=C0805C104J5RACTU, Polarized=N, Published=2008-06-19, Publisher="Texas Instruments", RoHS=Y, SizeArea_mm2=2.5, SizeAreaWB_mm2=6.75, SizeX_mm=2, SizeY_mm=1.25, SizeZ_mm=1.45, Supplier 1=Newark, Supplier 2=Mouser, Supplier 3=Farnell, Supplier Part Number 2=80-C0805C104J5R, Supplier Part Number 3=1414663, SymbolVersion=2008-07-09, TaMax_C=125, TaMin_C=-55, Technology=Ceramic, U/M=EA, VDC_V=50
C19: "CAP, CERM, 22 µF, 10 V,+/- 10%, X7R, 1206", Cap_Case=1206, Manufacturer=MuRata, Supplier Part Number 1=490-5309-1-ND, TempCo=X7R, Tolerance_%=10, Value2=10V, ValueDisplayed=22µF, AEC Category=Q200, AEC Qualified=?, Cap_F=0.000022, ComponentLink1Description="Datasheet link", ComponentLink1URL=http://search.murata.co.jp/Ceramy/PnsearchViewAction.do?HnOFG=ON&HnNFG=ON&SEL_CNT=50&sLang=en&sKey=GRM31CR71A226KE15L&x=9&y=9&search=startwith, CompType=Capacitor, Green_EU RoHS=Passed, Green_EU RoHS-2=Incomplete, Green_Lifecycle=Active, Green_REACh=Passed, LatestRevisionDate=2017-06-22, MountType=SMT, PackageReference=1206, PartNumber=GRM31CR71A226KE15L, Polarized=N, Published=2008-06-19, Publisher="Texas Instruments", RoHS=Y, SizeArea_mm2=5.12, SizeAreaWB_mm2=10.92, SizeX_mm=3.2, SizeY_mm=1.6, SizeZ_mm=1.8, Supplier 1=Digi-Key, Supplier 2=Mouser, Supplier 3=Farnell, Supplier Part Number 2=81-GRM31CR71A226K15L, Supplier Part Number 3=1797016, SymbolVersion=2008-07-09, TaMax_C=125, TaMin_C=-55, Technology=Ceramic, U/M=EA, VDC_V=10
C20 C23: library part Capacitor, "CAP, CERM, xxxF, xxV, [TempCo], xx%, [PackageReference]", Alternate Manufacturer=-, Alternate PartNumber=-, ComponentLink1Description="Datasheet Link", ComponentLink1URL="Paste URL for datasheet here", CompType=Capacitor, LatestRevisionDate=2016-08-13, LatestRevisionNote="Added Alternate PartNumber and Alternate Manufacturer parameters to appropriate components.", Manufacturer="Used in BOM report", MountType="SMT or TH (used in PnP report)", PackageReference="Used in PnP output and some BOM reports", PartNumber="Used in BOM report", Polarized=N, Publisher="Texas Instruments", RoHS="Used in BOM report.  Use Y or N.", SymbolVersion=2008-07-09, U/M=EA
C21: "CAP, CERM, 0.01 µF, 50 V,+/- 10%, X7R, 0805", Cap_Case=0805, Manufacturer=MuRata, Supplier Part Number 1=490-1664-1-ND, TempCo=X7R, Tolerance_%=10, Value2=50V, ValueDisplayed=0.01µF, AEC Category=Q200, AEC Qualified=?, Cap_F=0.00000001, ComponentLink1Description="Datasheet link", ComponentLink1URL=http://www.murata.com/products/catalog/pdf/c02e.pdf, CompType=Capacitor, Green_EU RoHS=Passed, Green_EU RoHS-2=Incomplete, Green_Lifecycle=Active, Green_REACh=Passed, LatestRevisionDate=2017-06-22, MountType=SMT, PackageReference=0805, PartNumber=GRM216R71H103KA01D, Polarized=N, Published=2008-06-19, Publisher="Texas Instruments", RoHS=Y, SizeArea_mm2=2.5, SizeAreaWB_mm2=6.75, SizeX_mm=2, SizeY_mm=1.25, SizeZ_mm=1.45, Supplier 1=Digi-Key, Supplier 2=Mouser, Supplier 3=Farnell, Supplier Part Number 2=81-GRM40X103K50D, Supplier Part Number 3=1828948, SymbolVersion=2008-07-09, TaMax_C=125, TaMin_C=-55, Technology=Ceramic, U/M=EA, VDC_V=50
C24: "CAP, CERM, 0.01 µF, 50 V,+/- 10%, X7R, 0603", Cap_Case=0603, Manufacturer=Kemet, Supplier Part Number 1=399-5346-1-ND, TempCo=X7R, Tolerance_%=10, Value2=50V, ValueDisplayed=0.01µF, AEC Category=Q200, AEC Qualified=?, Cap_F=0.00000001, ComponentLink1Description="Datasheet link", ComponentLink1URL=http://www.kemet.com/kemet/web/homepage/kechome.nsf/vapubfiles/F3102_Y5V.pdf/$file/F3102_Y5V.pdf, CompType=Capacitor, Green_EU RoHS=Passed, Green_EU RoHS-2=Passed, Green_Lifecycle=Active, Green_REACh=Passed, LatestRevisionDate=2017-06-22, MountType=SMT, PackageReference=0603, PartNumber=C0603X103K5RACTU, Polarized=N, Published=2008-06-19, Publisher="Texas Instruments", RoHS=Y, SizeArea_mm2=1.28, SizeAreaWB_mm2=4.68, SizeX_mm=1.6, SizeY_mm=0.8, SizeZ_mm=1, Supplier 1=Digi-Key, Supplier 2=Mouser, Supplier 3=Farnell, Supplier Part Number 2=80-C0603X103K5R, Supplier Part Number 3=1414026, SymbolVersion=2008-07-09, TaMax_C=125, TaMin_C=-55, Technology=Ceramic, U/M=EA, VDC_V=50
D1 D4: library part CMP-0028597-2, "Diode, Schottky, 100 V, 1 A, SMA", Manufacturer="Micro Commercial Components", Value1=1A, Value2=0.85V, AEC Category=Q101, AEC Qualified=N, ComponentLink1Description="Datasheet link", ComponentLink1URL=http://www.mccsemi.com/up_pdf/SS12-SS110%28HSMA%29.PDF, CompType=Diode, Green_EU RoHS=Incomplete, Green_EU RoHS-2=Incomplete, Green_Lifecycle="Not Set", Green_REACh=Incomplete, Io_A=1A, MountType=SMT, PackageReference=SMA, PartNumber=SS110-TP, RoHS=Y, SizeArea_mm2=16.3228, SizeAreaWB_mm2=37.3428, SizeX_mm=5.59, SizeY_mm=2.92, SizeZ_mm=2.87, TJmax_C=125°C, Type=Schottky, Vf_V=850mV, Vr_V=100V
D2: "Diode, Zener, 20 V, 500 mW, SOD-123", Manufacturer="Diodes Inc.", Power_W=0.5, Supplier Part Number 1=MMSZ5250B-FDICT-ND, Value1=0.5W, AEC Category=Q101, AEC Qualified=?, ComponentLink1Description="Datasheet link", ComponentLink1URL=http://www.diodes.com/datasheets/ds18010.pdf, CompType=Zener, LatestRevisionDate=2017-06-20, LatestRevisionNote="Updated Supplier Data", MountType=SMT, PackageReference=SOD-123, PartNumber=MMSZ5250B-7-F, Published=2008-10-08, Publisher="Texas Instruments", RJA_CperW=350, RoHS=Y, SizeArea_mm2=6.545, SizeAreaWB_mm2=13.095, SizeX_mm=3.85, SizeY_mm=1.7, SizeZ_mm=1.35, Supplier 1=Digi-Key, Supplier 2=Mouser, Supplier 3=Farnell, Supplier Part Number 2=621-MMSZ5250B-F, Supplier Part Number 3=2061484, SymbolCreator=a0412235, SymbolVersion=2010-08-25, U/M=EA, Vr_V=N/A, Vz_V=20
D3: "Diode, TVS, Uni, 170 V, 275 Vc, SMB", Manufacturer="Diodes Inc.", Power_W=5, Supplier Part Number 1=SMBJ170A-FDICT-ND, Value1=5W, AEC Category=Q101, AEC Qualified=?, ComponentLink1Description="Datasheet link", ComponentLink1URL=http://www.diodes.com/datasheets/ds19002.pdf, CompType=TVS, LatestRevisionDate=2017-06-20, LatestRevisionNote="Updated Supplier Data", MountType=SMT, PackageReference=SMB, PartNumber=SMBJ170A-13-F, Published=2008-10-08, Publisher="Texas Instruments", RoHS=Y, SizeArea_mm2=21.336, SizeAreaWB_mm2=44.156, SizeX_mm=5.6, SizeY_mm=3.81, SizeZ_mm=2.6, Supplier 1=Digi-Key, Supplier 2=Mouser, Supplier Part Number 2=621-SMBJ170A-13-F, SymbolVersion=2012-01-13, U/M=EA, Vr_V=170, Vz_V=N/A
D5: "Diode, Ultrafast, 600 V, 1 A, SMA", Manufacturer="Diodes Inc.", Supplier Part Number 1=US1J-FDICT-ND, Value1=1A, Value2=1.7V, AEC Category=Q101, AEC Qualified=?, ComponentLink1Description="Datasheet link", ComponentLink1URL=http://www.diodes.com/datasheets/ds16008.pdf, CompType=Diode, Green_EU RoHS="Passed with Exemption", Green_EU RoHS-2=Passed, Green_Lifecycle=Active, Green_REACh=Passed, Io_A=1, LatestRevisionDate=2017-06-19, MountType=SMT, PackageReference=SMA, PartNumber=US1J-13-F, Published=2008-06-26, Publisher="Texas Instruments", RoHS=Y, SizeArea_mm2=16.3228, SizeAreaWB_mm2=37.3428, SizeX_mm=5.59, SizeY_mm=2.92, SizeZ_mm=2.87, Supplier 1=Digi-Key, Supplier 2=Newark, Supplier 3=Mouser, Supplier Part Number 2=12T2262, Supplier Part Number 3=621-US1J-F, SymbolVersion=2008-12-08, TJmax_C=150, Type=Ultrafast, U/M=EA, Vf_V=1.7, Vr_V=600
D6: "Diode, Zener, 18 V, 500 mW, SOD-123", Manufacturer="Diodes Inc.", Power_W=0.5, Supplier Part Number 1=MMSZ5248B-FDICT-ND, Value1=0.5W, AEC Category=Q101, AEC Qualified=?, ComponentLink1Description="Datasheet link", ComponentLink1URL=http://www.diodes.com/datasheets/ds18010.pdf, CompType=Zener, Green_EU RoHS=Passed, Green_EU RoHS-2=Passed, Green_Lifecycle=Active, Green_REACh=Passed, LatestRevisionDate=2017-06-20, LatestRevisionNote="Updated Supplier Data", MountType=SMT, PackageReference=SOD-123, PartNumber=MMSZ5248B-7-F, Published=2008-10-08, Publisher="Texas Instruments", RJA_CperW=350, RoHS=Y, SizeArea_mm2=6.545, SizeAreaWB_mm2=13.095, SizeX_mm=3.85, SizeY_mm=1.7, SizeZ_mm=1.35, Supplier 1=Digi-Key, Supplier 2=Mouser, Supplier 3=Farnell, Supplier Part Number 2=621-MMSZ5248B-F, Supplier Part Number 3=2061483, SymbolCreator=a0412235, SymbolVersion=2010-08-25, U/M=EA, Vr_V=N/A, Vz_V=18
D7: library part CMP-0028422-1, "Diode, Schottky, 80 V, 3 A, SMC", Manufacturer="Diodes Inc.", Supplier Part Number 1=B380-FDICT-ND, Value1=3A, Value2=0.79V, AEC Category=Q101, AEC Qualified=?, ComponentLink1Description="Datasheet link", ComponentLink1URL=http://www.diodes.com/datasheets/ds30020.pdf, CompType=Diode, Green_EU RoHS="Passed with Exemption", Green_EU RoHS-2=Passed, Green_Lifecycle=Active, Green_REACh=Passed, Io_A=3A, LatestRevisionDate=2017-05-08, MountType=SMT, PackageReference=SMC, PartNumber=B380-13-F, Published=2008-06-26, Publisher="Texas Instruments", RJC_CperW=10, RoHS=Y, SizeArea_mm2=50.5686, SizeAreaWB_mm2=83.2686, SizeX_mm=8.13, SizeY_mm=6.22, SizeZ_mm=2.6, Supplier 1=Digi-Key, Supplier 2=Mouser, Supplier Part Number 2=621-B380-F, TJmax_C=125°C, Type=Schottky, U/M=EA, Vf_V=790mV, Vr_V=80V
D8: "Diode, Superfast Rectifier, 150 V, 1 A, SMA", Manufacturer="Diodes Inc.", Supplier Part Number 1=ES1C-FDICT-ND, Value1=1A, Value2=0.92V, AEC Category=Q101, AEC Qualified=?, ComponentLink1Description="Datasheet link", ComponentLink1URL=http://www.diodes.com/datasheets/ds14001.pdf, CompType=Diode, Green_EU RoHS=Incomplete, Green_EU RoHS-2=Incomplete, Green_Lifecycle="Not Set", Green_REACh=Incomplete, Io_A=1, LatestRevisionDate=2017-06-19, MountType=SMT, PackageReference=SMA, PartNumber=ES1C-13-F, Published=2008-06-26, Publisher="Texas Instruments", RJC_CperW=25, RoHS=Y, SizeArea_mm2=16.3228, SizeAreaWB_mm2=37.3428, SizeX_mm=5.59, SizeY_mm=2.92, SizeZ_mm=2.87, Supplier 1=Digi-Key, Supplier 2=Mouser, Supplier Part Number 2=621-ES1C-F, SymbolVersion=2008-12-08, TJmax_C=150, Type="Superfast Rectifier", U/M=EA, Vf_V=0.92, Vr_V=150
"HIGH VOLTAGE": library part IEC_HighVoltage, "IEC 61010-1 High Voltage Warning", LatestRevisionDate=2016-03-21, Published=2009-03-03, Publisher="Texas Instruments", SymbolCreator=a0412235, SymbolVersion=2011-08-22
L1: "Inductor, Shielded Drum Core, Ferrite, 33 µH, 0.68 A, 0.42 ohm, SMD", Manufacturer=Coilcraft, Value1="0.42 ohm", Value2=0.68A, ValueDisplayed=33µH, AEC Category=Q200, AEC Qualified=?, ComponentLink1Description="Datasheet link", ComponentLink1URL=http://www.coilcraft.com/pdfs/lps4018.pdf, CompType=Inductor, DCR_ohm=0.42, Green_EU RoHS=Incomplete, Green_EU RoHS-2=Incomplete, Green_Lifecycle="Not Set", Green_REACh=Incomplete, Imax_A=0.68, Ind_H=33.0E-6, Irms="0.8A @ 40C rise", Isat="0.68A @ 30% inductance drop", LatestRevisionDate=2017-05-12, Material=Ferrite, MountType=SMT, PackageReference=LPS4018, PartNumber=LPS4018-333MLB, Published=2008-06-26, Publisher="Texas Instruments", RoHS=Y, SizeArea_mm2=15.21, SizeAreaWB_mm2=24.01, SizeX_mm=3.9, SizeY_mm=3.9, SizeZ_mm=1.7, SymbolVersion=2008-07-23, Technology="Shielded Drum Core"
Q1: library part CMP-0001262-3, "MOSFET, N-CH, 750 V, 5.4 A, DPAK", Alternate Manufacturer=None, Manufacturer="Infineon Technologies", Supplier Part Number 1=IPD70R1K4CEAUMA1CT-ND, Value2="10.5 nC", AEC Category=Q101, AEC Qualified=N, ChMode=Enhancement, ChType=N, ComponentLink1Description="Datasheet link", ComponentLink1URL=http://www.infineon.com/dgdl/Infineon-IPD70R1K4CE-DS-v02_00-EN.pdf?fileId=5546d462533600a40153a2a2125c7af1, CompType=MOSFET, IdsMax_A=5.4A, MountType=SMT, PackageReference=DPAK, PartNumber=IPD70R1K4CEAUMA1, QgTyp_nC=10.5, RoHS=Y, SizeArea_mm2=64.8114, SizeAreaWB_mm2=101.7114, SizeX_mm=9.91, SizeY_mm=6.54, SizeZ_mm=2.29, Supplier 1=Digi-Key, Supplier 2=Mouser, Supplier Part Number 2=726-IPD70R1K4CEAUMA1, VdsMax_V=750V, Vgs_V=20V
Q2 Q3: library part "MMBT3906, Fairchild Semiconductor", "Transistor, PNP, 40 V, 0.2 A, SOT-23", Manufacturer="Fairchild Semiconductor", Supplier Part Number 1=MMBT3906FSCT-ND, Value1="0.2 A", Value2=300, AEC Category=Q101, AEC Qualified=?, ComponentLink1Description="Datasheet link", ComponentLink1URL=http://www.fairchildsemi.com/ds/MM/MMBT3906.pdf, CompType=BJT, Green_EU RoHS=Passed, Green_EU RoHS-2=Passed, Green_Lifecycle=Active, Green_REACh=Passed, HfeMax=300, IcRated_A=0.2, LatestRevisionDate=2017-06-09, MountType=SMT, NPN=0, PackageReference=SOT-23, PartNumber=MMBT3906, PNP=1, Published=2008-07-31, Publisher="Texas Instruments", RoHS=Y, SizeArea_mm2=7.5, SizeAreaWB_mm2=14, SizeX_mm=2.5, SizeY_mm=3, SizeZ_mm=1.1, Supplier 1=Digi-Key, Supplier 2=Farnell, Supplier Part Number 2=9846832, SymbolVersion=2008-07-31, TaMax_C=150, TaMin_C=-55, U/M=EA, Vceo_V=40, Vcesat1_V=0.25
R1 R10 R12 R17 R29: library part Resistor, "RES, xxx ohm, x%, xW, [PackageReference]", Alternate Manufacturer=-, Alternate PartNumber=-, ComponentLink1Description="Datasheet Link", ComponentLink1URL="Paste URL for datasheet here", CompType=Resistor, LatestRevisionNote="Added Alternate PartNumber and Alternate Manufacturer parameters to appropriate components.", Manufacturer="Used in BOM report", MountType="SMT or TH (used in PnP report)", PackageReference="Used in PnP output and some BOM reports", PartNumber="Used in BOM report", Publisher="Texas Instruments", RoHS="Used in BOM report.  Use Y or N.", SymbolVersion=2009-05-29, U/M=EA
  R1: LatestRevisionDate=2017-05-31
  R10 R12 R17 R29: LatestRevisionDate=2016-12-05
R2 R3 R4: "RES, 4.99 M, 1%, 0.125 W, 0805", Manufacturer=Vishay-Dale, Power_W=0.125, Supplier Part Number 1=541-4.99MCCT-ND, TempCo="100 ppm/C", Tolerance_%=1, Value1=1%, Value2=0.125W, Value_Code=4M99, ValueDisplayed=4.99M, AEC Category=Q200, AEC Qualified=?, ComponentLink1Description="Datasheet link", ComponentLink1URL=http://www.vishay.com/docs/20035/dcrcwe3.pdf, CompType=Resistor, EIA_Code=E96, LatestRevisionDate=2017-06-23, MountType=SMT, PackageReference=0805, PartNumber=CRCW08054M99FKEA, Published=2008-06-26, Publisher="Texas Instruments", Res_ohm=4990000, RoHS=Y, SizeArea_mm2=2.5, SizeX_mm=2, SizeY_mm=1.25, SizeZ_mm=1.45, Supplier 1=Digi-Key, Supplier 2=Newark, Supplier 3=Mouser, Supplier Part Number 2=53K0233, Supplier Part Number 3=71-CRCW08054M99FKEA, SymbolVersion=2009-05-29, Technology="Thick Film", U/M=EA, VDC_V=150
R5: "RES, 200, 5%, 1 W, AEC-Q200 Grade 0, 2512", Manufacturer=Vishay-Dale, Power_W=1, Supplier Part Number 1=541-200XCT-ND, TempCo="200 ppm/C", Tolerance_%=5, Value1=5%, Value2=1W, Value_Code=200R, ValueDisplayed=200, AEC Category=Q200, AEC Grade=0, AEC Qualified=Y, ComponentLink1Description="Datasheet link", ComponentLink1URL=http://www.vishay.com/doc?20035, CompType=Resistor, EIA_Code=E24, Green_EU RoHS="Passed with Exemption", Green_EU RoHS-2=Passed, Green_Lifecycle=Active, Green_REACh=Passed, LatestRevisionDate=2017-06-11, MountType=SMT, PackageReference=2512, PartNumber=CRCW2512200RJNEG, Published=2008-06-26, Publisher="Texas Instruments", Res_ohm=200, RoHS=Y, SizeArea_mm2=20.16, SizeX_mm=6.3, SizeY_mm=3.2, SizeZ_mm=0.71, Supplier 1=Digi-Key, SymbolVersion=2009-05-29, Technology="Thick Film", U/M=EA, VDC_V=500
R6: "RES, 30.1, 1%, 0.125 W, 0805", Manufacturer=Vishay-Dale, Power_W=0.125, Supplier Part Number 1=541-30.1CCT-ND, TempCo="100 ppm/C", Tolerance_%=1, Value1=1%, Value2=0.125W, Value_Code=30R1, ValueDisplayed=30.1, AEC Category=Q200, AEC Qualified=?, ComponentLink1Description="Datasheet link", ComponentLink1URL=http://www.vishay.com/docs/20035/dcrcwe3.pdf, CompType=Resistor, EIA_Code=E96, LatestRevisionDate=2017-06-23, MountType=SMT, PackageReference=0805, PartNumber=CRCW080530R1FKEA, Published=2008-06-26, Publisher="Texas Instruments", Res_ohm=30.1, RoHS=Y, SizeArea_mm2=2.5, SizeX_mm=2, SizeY_mm=1.25, SizeZ_mm=1.45, Supplier 1=Digi-Key, Supplier 2=Newark, Supplier 3=Mouser, Supplier Part Number 2=53K0141, Supplier Part Number 3=71-CRCW0805-30.1-E3, SymbolVersion=2009-05-29, Technology="Thick Film", U/M=EA, VDC_V=150
R7 R11 R15 R16: "RES, 0, 5%, 0.1 W, 0603", Manufacturer=Vishay-Dale, Power_W=0.1, Supplier Part Number 1=541-0.0GCT-ND, TempCo="200 ppm/C", Tolerance_%=5, Value1=5%, Value2=0.1W, Value_Code=0000, ValueDisplayed=0, AEC Category=Q200, AEC Qualified=?, ComponentLink1Description="Datasheet link", ComponentLink1URL=http://www.vishay.com/docs/20035/dcrcwe3.pdf, CompType=Resistor, EIA_Code=E24, Green_EU RoHS="Passed with Exemption", Green_EU RoHS-2=Passed, Green_Lifecycle=Active, Green_REACh=Passed, LatestRevisionDate=2017-06-13, MountType=SMT, PackageReference=0603, PartNumber=CRCW06030000Z0EA, Published=2008-06-26, Publisher="Texas Instruments", Res_ohm=0, RoHS=Y, SizeArea_mm2=1.28, SizeX_mm=1.6, SizeY_mm=0.8, SizeZ_mm=1, Supplier 1=Digi-Key, Supplier 2=Newark, Supplier 3=Mouser, Supplier Part Number 2=52K8014, Supplier Part Number 3=71-CRCW0603-0-E3, SymbolVersion=2009-05-29, Technology="Thick Film", U/M=EA, VDC_V=75
R8 R9: "RES, 49.9, 1%, 0.1 W, 0603", Manufacturer=Vishay-Dale, Power_W=0.1, Supplier Part Number 1=541-49.9HCT-ND, TempCo="100 ppm/C", Tolerance_%=1, Value1=1%, Value2=0.1W, Value_Code=49R9, ValueDisplayed=49.9, ComponentLink1Description="Datasheet link", ComponentLink1URL=http://www.vishay.com/docs/20035/dcrcwe3.pdf, CompType=Resistor, EIA_Code=E96, MountType=SMT, PackageReference=0603, PartNumber=CRCW060349R9FKEA, Published=2008-06-26, Publisher="Texas Instruments", Res_ohm=49.9, RoHS=Y, Supplier 1=Digi-Key, SymbolVersion=2009-05-29, Technology="Thick Film", U/M=EA, VDC_V=75
  R8: AEC Category=Q200, AEC Qualified=?, Green_EU RoHS="Passed with Exemption", Green_EU RoHS-2=Passed, Green_Lifecycle=Active, Green_REACh=Passed, LatestRevisionDate=2017-06-13, SizeArea_mm2=1.28, SizeX_mm=1.6, SizeY_mm=0.8, SizeZ_mm=1, Supplier 2=Newark, Supplier 3=Mouser, Supplier Part Number 2=52K8566, Supplier Part Number 3=71-CRCW0603-49.9-E3
  R9: LatestRevisionDate=2014-12-01, Supplier 2=Mouser, Supplier 3=Farnell, Supplier Part Number 2=71-CRCW0603-49.9-E3, Supplier Part Number 3=1469817
R13: "RES, 115 k, 1%, 0.1 W, 0603", Manufacturer=Vishay-Dale, Power_W=0.1, Supplier Part Number 1=541-115KHCT-ND, TempCo="100 ppm/C", Tolerance_%=1, Value1=1%, Value2=0.1W, Value_Code=115k, AEC Category=Q200, AEC Qualified=?, ComponentLink1Description="Datasheet link", ComponentLink1URL=http://www.vishay.com/docs/20035/dcrcwe3.pdf, CompType=Resistor, EIA_Code=E96, Green_EU RoHS="Passed with Exemption", Green_EU RoHS-2=Passed, Green_Lifecycle=Active, Green_REACh=Passed, LatestRevisionDate=2017-06-13, MountType=SMT, PackageReference=0603, PartNumber=CRCW0603115KFKEA, Published=2008-06-26, Publisher="Texas Instruments", Res_ohm=115000, RoHS=Y, SizeArea_mm2=1.28, SizeX_mm=1.6, SizeY_mm=0.8, SizeZ_mm=1, Supplier 1=Digi-Key, Supplier 2=Newark, Supplier 3=Mouser, Supplier Part Number 2=52K8099, Supplier Part Number 3=71-CRCW0603-115K-E3, SymbolVersion=2009-05-29, Technology="Thick Film", U/M=EA, ValueDisplayed=115k, VDC_V=75
R14: "RES, 100 k, 1%, 0.1 W, 0603", Manufacturer=Vishay-Dale, Power_W=0.1, Supplier Part Number 1=541-100KHCT-ND, TempCo="100 ppm/C", Tolerance_%=1, Value1=1%, Value2=0.1W, Value_Code=100k, AEC Category=Q200, AEC Qualified=?, ComponentLink1Description="Datasheet link", ComponentLink1URL=http://www.vishay.com/docs/20035/dcrcwe3.pdf, CompType=Resistor, EIA_Code=E96, Green_EU RoHS="Passed with Exemption", Green_EU RoHS-2=Passed, Green_Lifecycle=Active, Green_REACh=Passed, LatestRevisionDate=2017-06-13, MountType=SMT, PackageReference=0603, PartNumber=CRCW0603100KFKEA, Published=2008-06-26, Publisher="Texas Instruments", Res_ohm=100000, RoHS=Y, SizeArea_mm2=1.28, SizeX_mm=1.6, SizeY_mm=0.8, SizeZ_mm=1, Supplier 1=Digi-Key, Supplier 2=Newark, Supplier 3=Mouser, Supplier Part Number 2=42K3668, Supplier Part Number 3=71-CRCW0603-100K-E3, SymbolVersion=2009-05-29, Technology="Thick Film", U/M=EA, ValueDisplayed=100k, VDC_V=75